# EAGLE board NOR GATE (EAGLE 6.5.0)
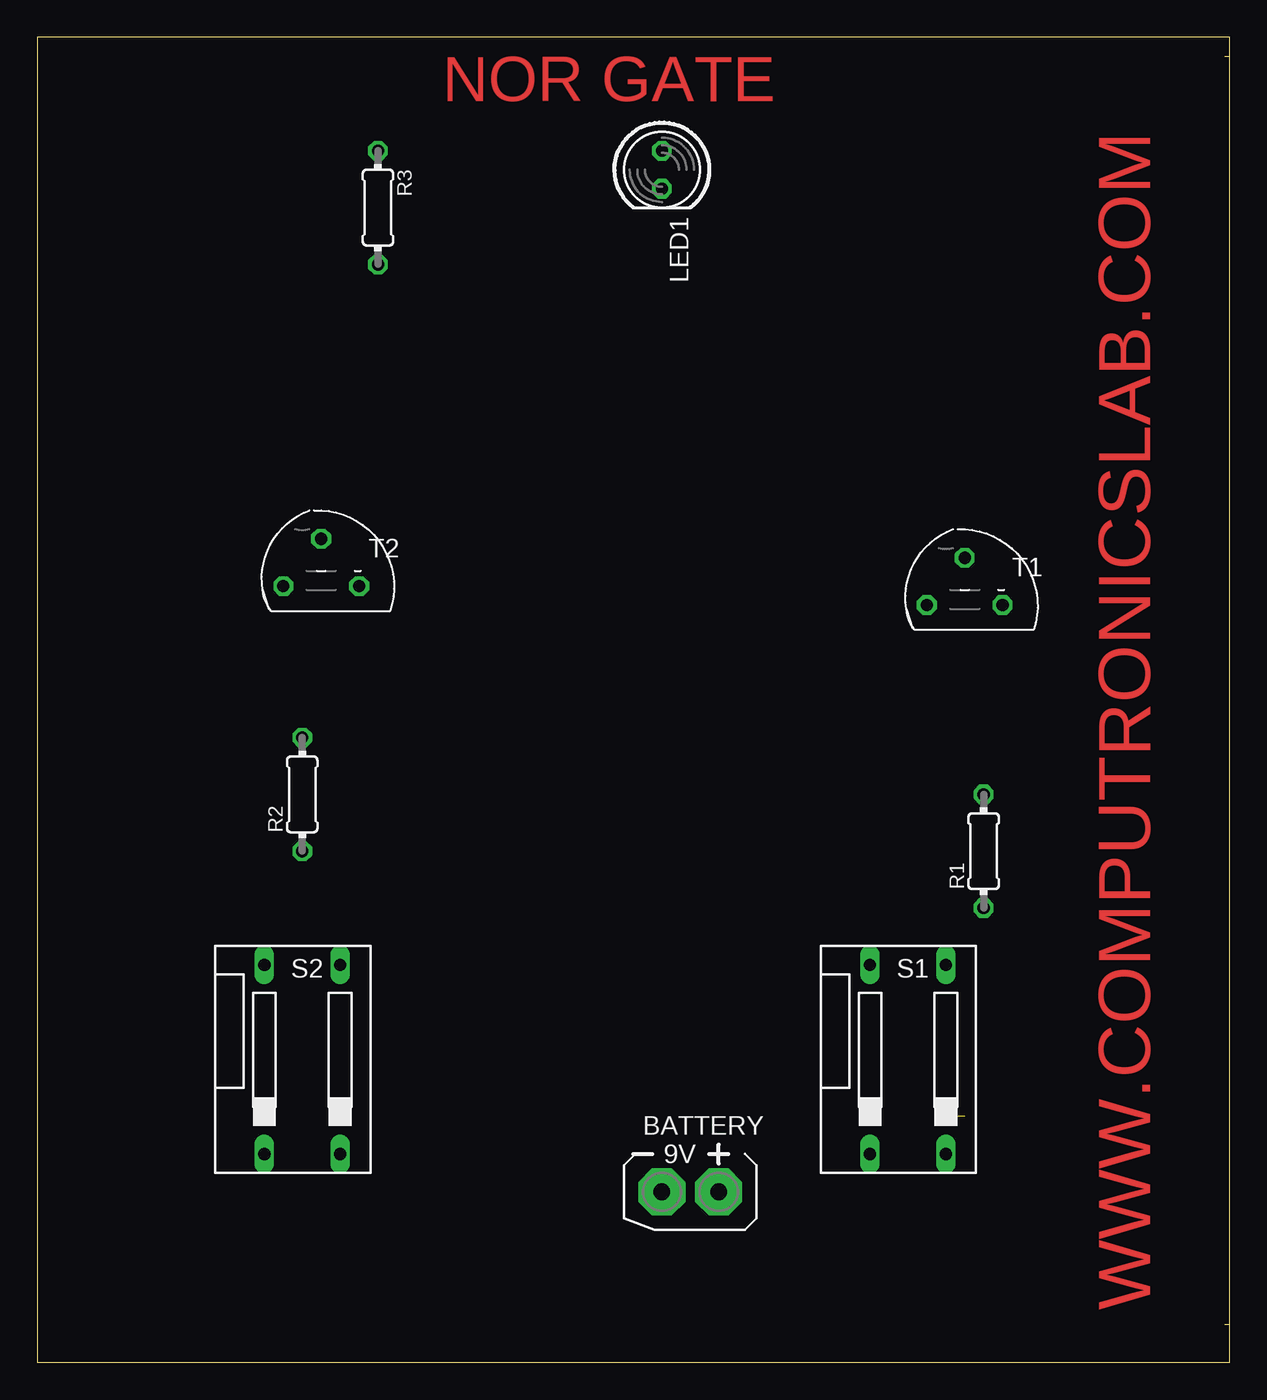
[diagram p0: board, top side]
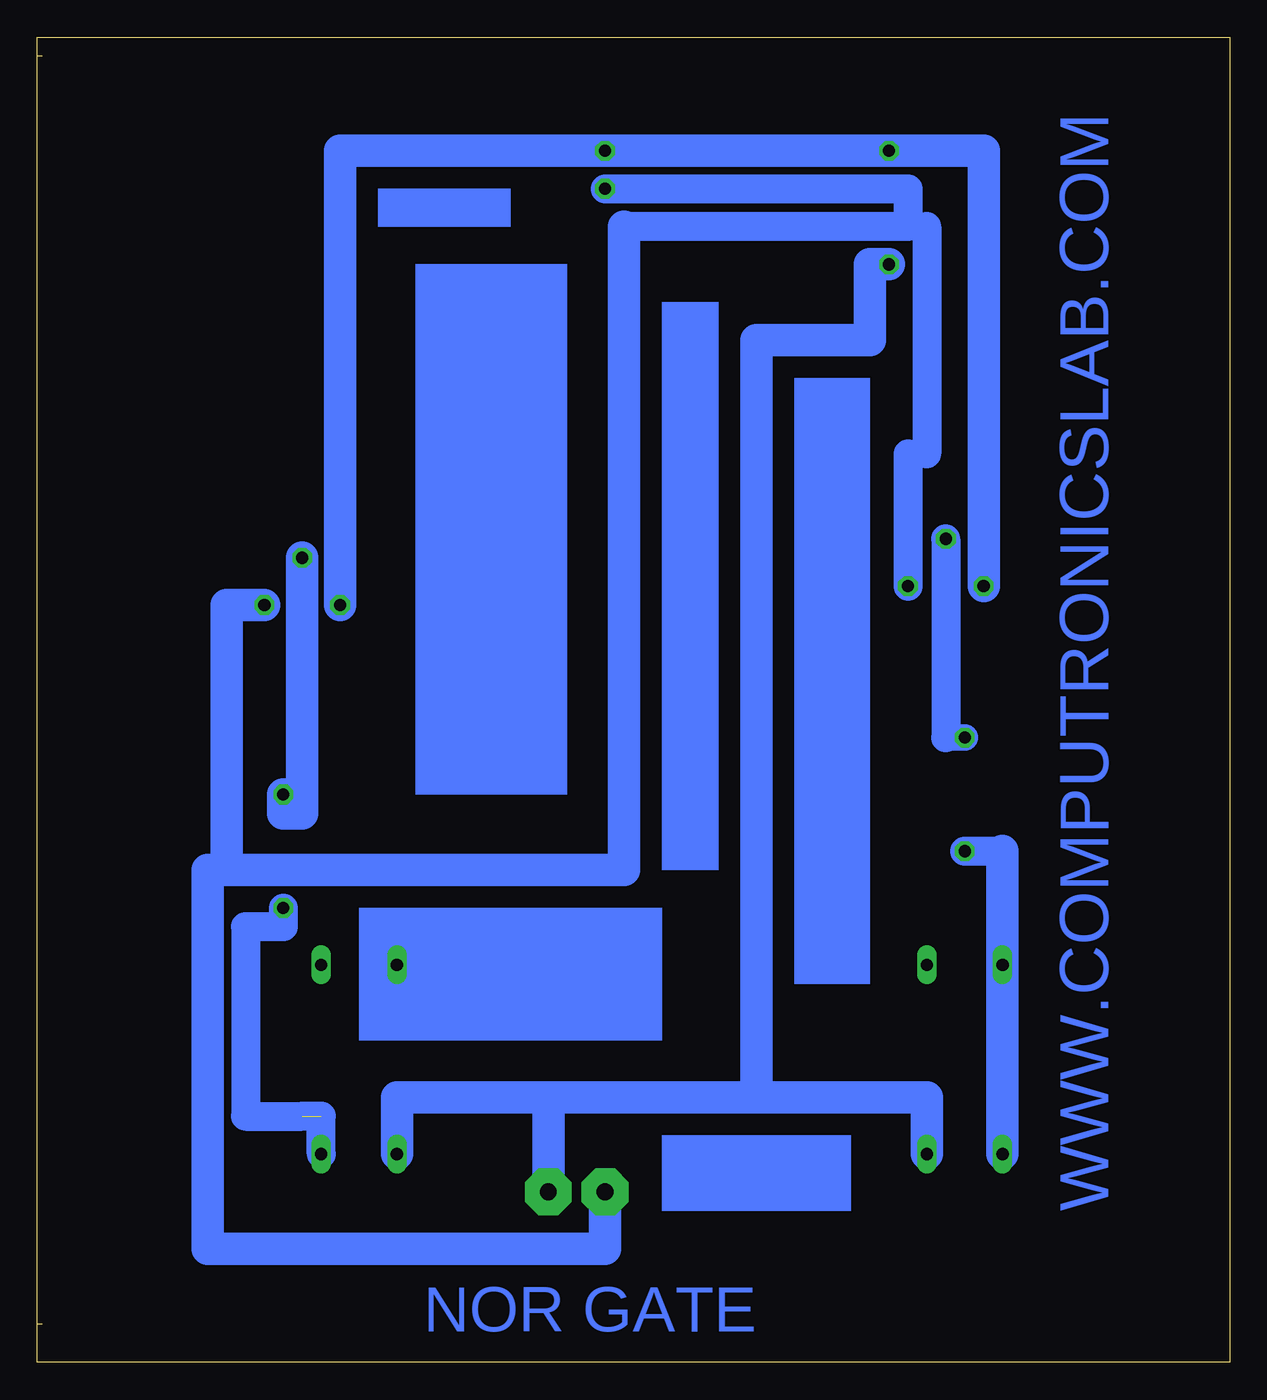
[diagram p1: board, bottom side, seen from below]

Size 80.01 x 88.9 mm. Coordinates in mm from the lower left corner, seen from the top.
Outline: 80.01,2.54 80.01,0 0,0 0,88.9 80.01,88.9 80.01,87.63
Outline: 79.68,2.54 80.01,2.54
Outline: 80.01,2.54 80.01,87.63
Outline: 79.68,87.62 80.01,87.63
Copper layers (1*16): Top 0.035mm / dielectric 1.5mm / Bottom 0.035mm
Design rules "default": minimum track width 10mil, minimum drill 24mil, track to track 8mil, track to pad 8mil, pad to pad 8mil, via to via 8mil, smd to smd 8mil, copper to edge 40mil, drill to drill 8mil, minimum pad ring 10mil, minimum via ring 8mil, stop-mask expansion 4mil, vias tented up to drill 0mil, thermal gap 10mil

## Footprints (pad centres in the part's own frame; a part is rotated, then mirrored left to right if it is on the bottom)
AB9V = drill 1.118 pad 3.15 octagon: + 0,2.54; - 0,-1.27
LED5MM = drill 0.813 octagon: A -1.27,0; K 1.27,0
0204/7 = drill 0.813 octagon: 1 -3.81,0; 2 3.81,0
DS-02 = drill 0.813 long: 1 -5.08,-6.35; 2 0,-6.35; 3 0,6.35; 4 -5.08,6.35
TO92 = drill 0.813 octagon: 1 2.54,-1.27; 2 0,1.905; 3 -2.54,-1.27

## Placement (x,y rotation side)
BATTERY  9V  [AB9V]  43.18,11.43 270 top
LED1  [LED5MM]  41.91,80.01 270 top
R1  10K  [0204/7]  63.5,34.29 90 top
R2  10K  [0204/7]  17.78,38.1 90 top
R3  330E  [0204/7]  22.86,77.47 270 top
S1  PUSH SWITCH  [DS-02]  60.96,20.32 0 top
S2  PUSH SWITCH  [DS-02]  20.32,20.32 0 top
T1  BC547  [TO92]  62.23,52.07 0 top
T2  BC547  [TO92]  19.05,53.34 0 top

## Library data of the parts
BATTERY = battery
LED1 = led
R1-R3 = eagle-ltspice; SPICEMODEL: NONE; SPICEPREFIX: R
S1 S2 = switch-dil; OC_FARNELL: 9472126; OC_NEWARK: unknown
T1 T2 = transistor

## Nets
N$1: R1.2 T1.2
N$2: R2.2 T2.2
N$3: BATTERY.- LED1.K T1.1 T2.1
N$4: LED1.A R3.1 T1.3 T2.3
N$5: R1.1 S1.2
N$6: R2.1 S2.1
N$7: BATTERY.+ R3.2 S1.1 S2.2

## Tracks (layer width: path | path; a pad name or v marks a point on that pad's centre or on a via)
N$1
  Bottom 2.184: T1.2 62.23,36.83 63.5,36.83 R1.2
N$2
  Bottom 0.254: 19.05,55.88 T2.2 19.05,54.61
  Bottom 1.778: 19.05,41.91 R2.2
  Bottom 1.93: T2.2 19.05,41.91
N$3
  Bottom 0.254: 21.59,76.2 20.32,76.2 | 20.32,60.96 21.59,60.96
  Bottom 1.93: 20.32,76.2 20.32,60.96 | 21.59,60.96 T2.1 | LED1.K 21.59,78.74 21.59,76.2 40.64,76.2
  Bottom 2.184: 40.64,76.2 40.64,33.02 60.96,33.02 67.31,33.02 | 67.31,33.02 67.31,50.8 T1.1 | BATTERY.- 41.91,7.62 68.58,7.62 68.58,33.02 67.31,33.02
N$4
  Bottom 2.184: T2.3 16.51,81.28 R3.1 LED1.A 59.69,81.28 T1.3
N$5  (1 unrouted)
  Bottom 1.93: R1.1 63.5,29.21 66.04,29.21 66.04,16.51 62.23,16.51 60.96,16.51 S1.2
N$6
  Bottom 1.93: R2.1 15.24,34.29
  Bottom 2.184: 15.24,34.29 S2.1
N$7
  Bottom 2.184: 45.72,17.78 31.75,17.78 | 31.75,17.78 20.32,17.78 S2.2 | 31.75,17.78 31.75,68.58 24.13,68.58 24.13,73.66 R3.2 | 45.72,17.78 BATTERY.+ | 45.72,17.78 55.88,17.78 S1.1
(copper drawn outside any net)
  shapes: Bottom area x6

## Text on the board
Top: NOR GATE | WWW.COMPUTRONICSLAB.COM
Bottom: WWW.COMPUTRONICSLAB.COM | NOR GATE